# Altium PCB Sensor_current_V1.PcbDoc
Units mm, origin at the board's own origin, x right, y up, seen from the top; angles counter-clockwise.
Board outline 54.25 x 68 mm, 2 copper layers (Top Layer, Bottom Layer), stack 1.58 mm thick; 84 components, 14 nets, 214 pads, 33 vias.
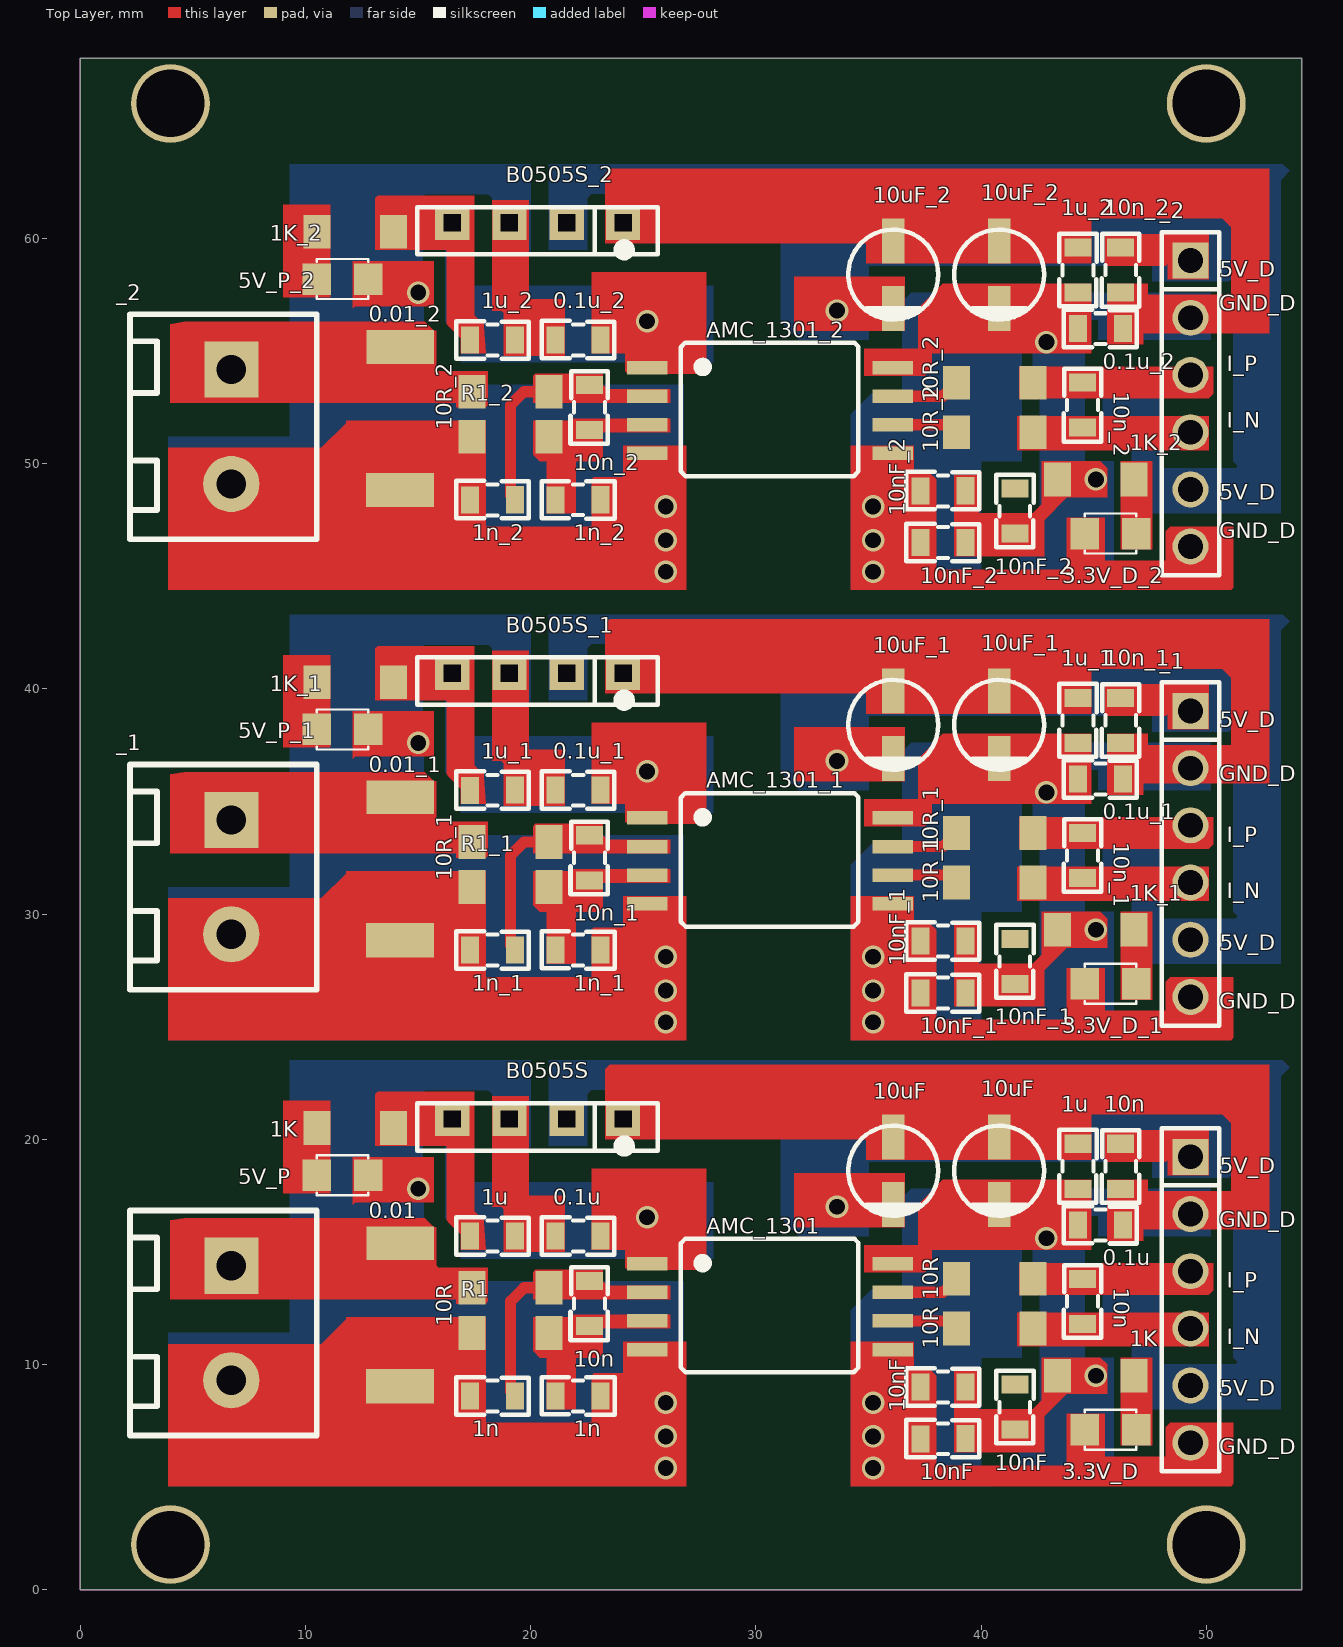
[diagram p0: Top Layer view]
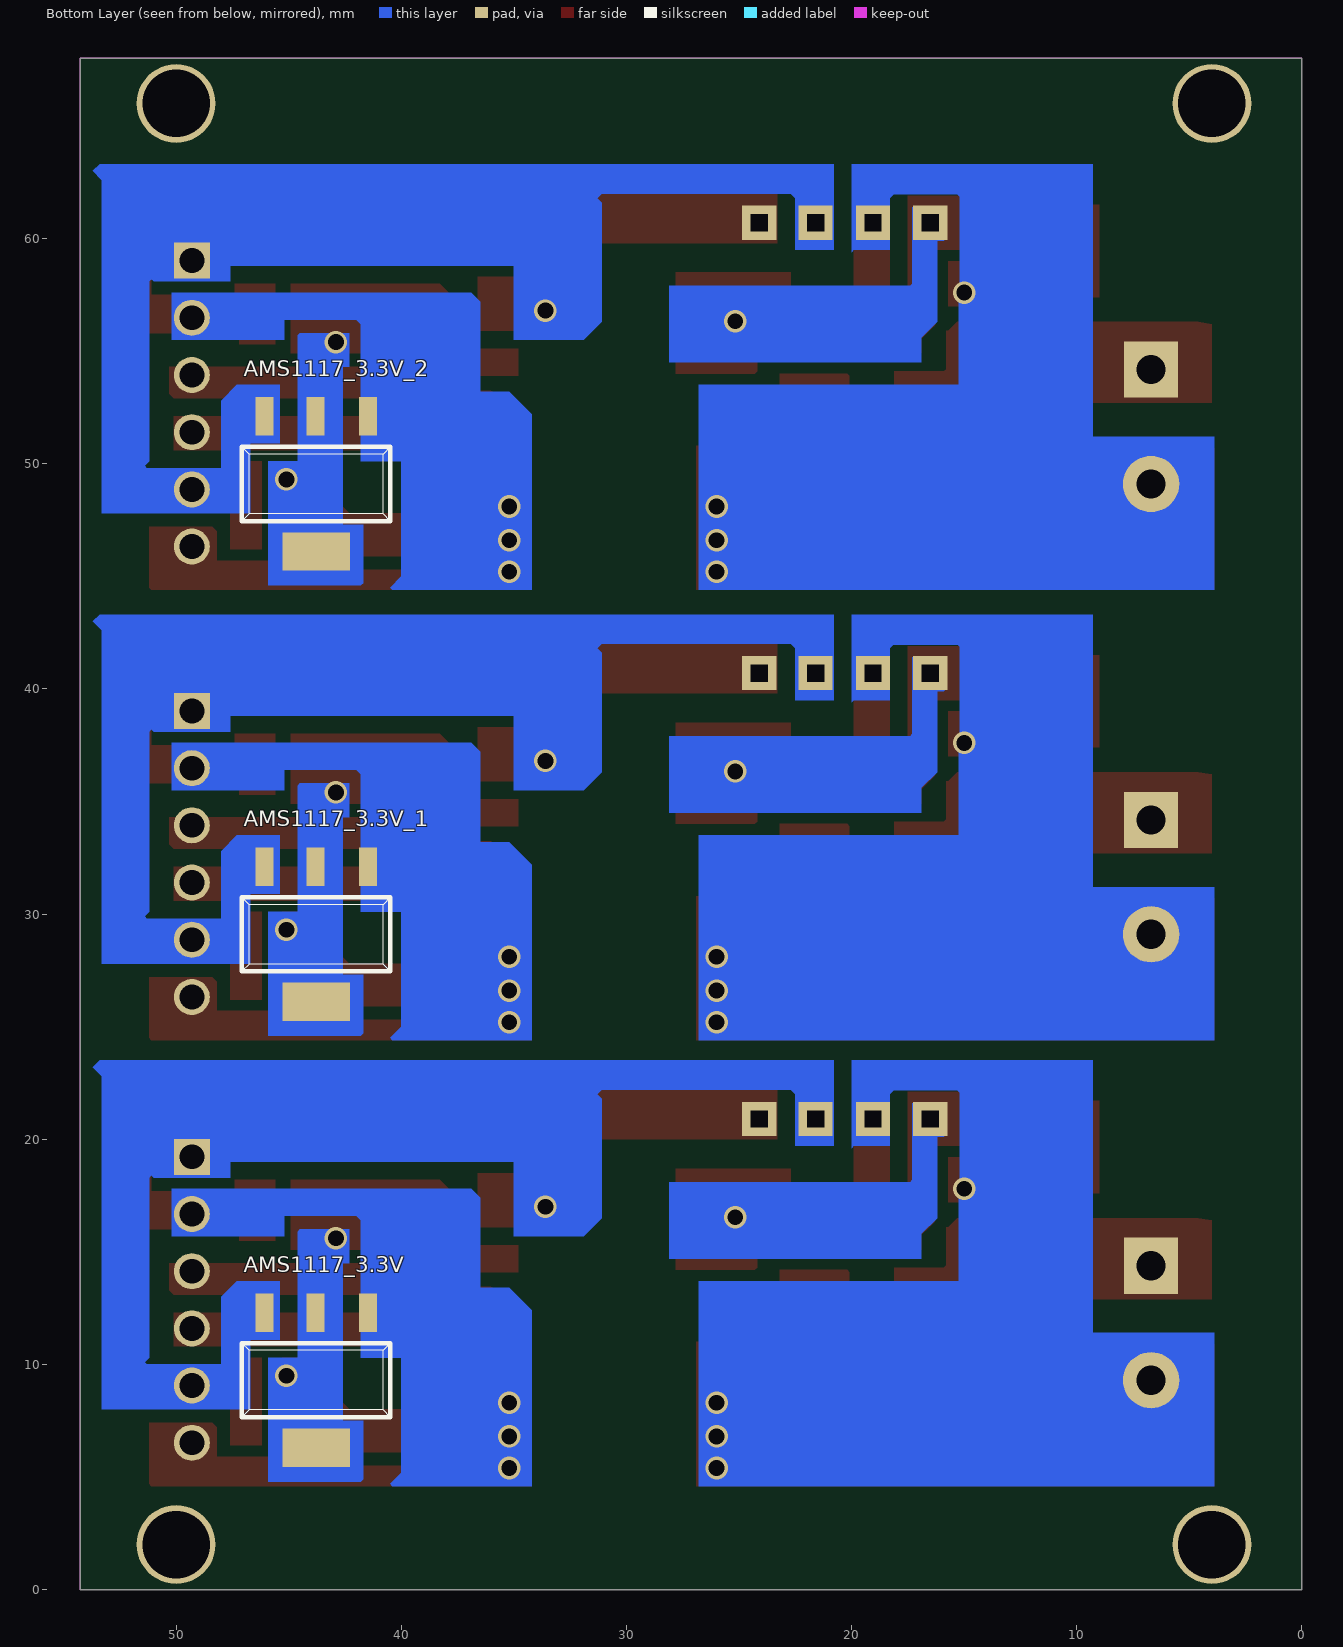
[diagram p1: Bottom Layer view, seen from below]
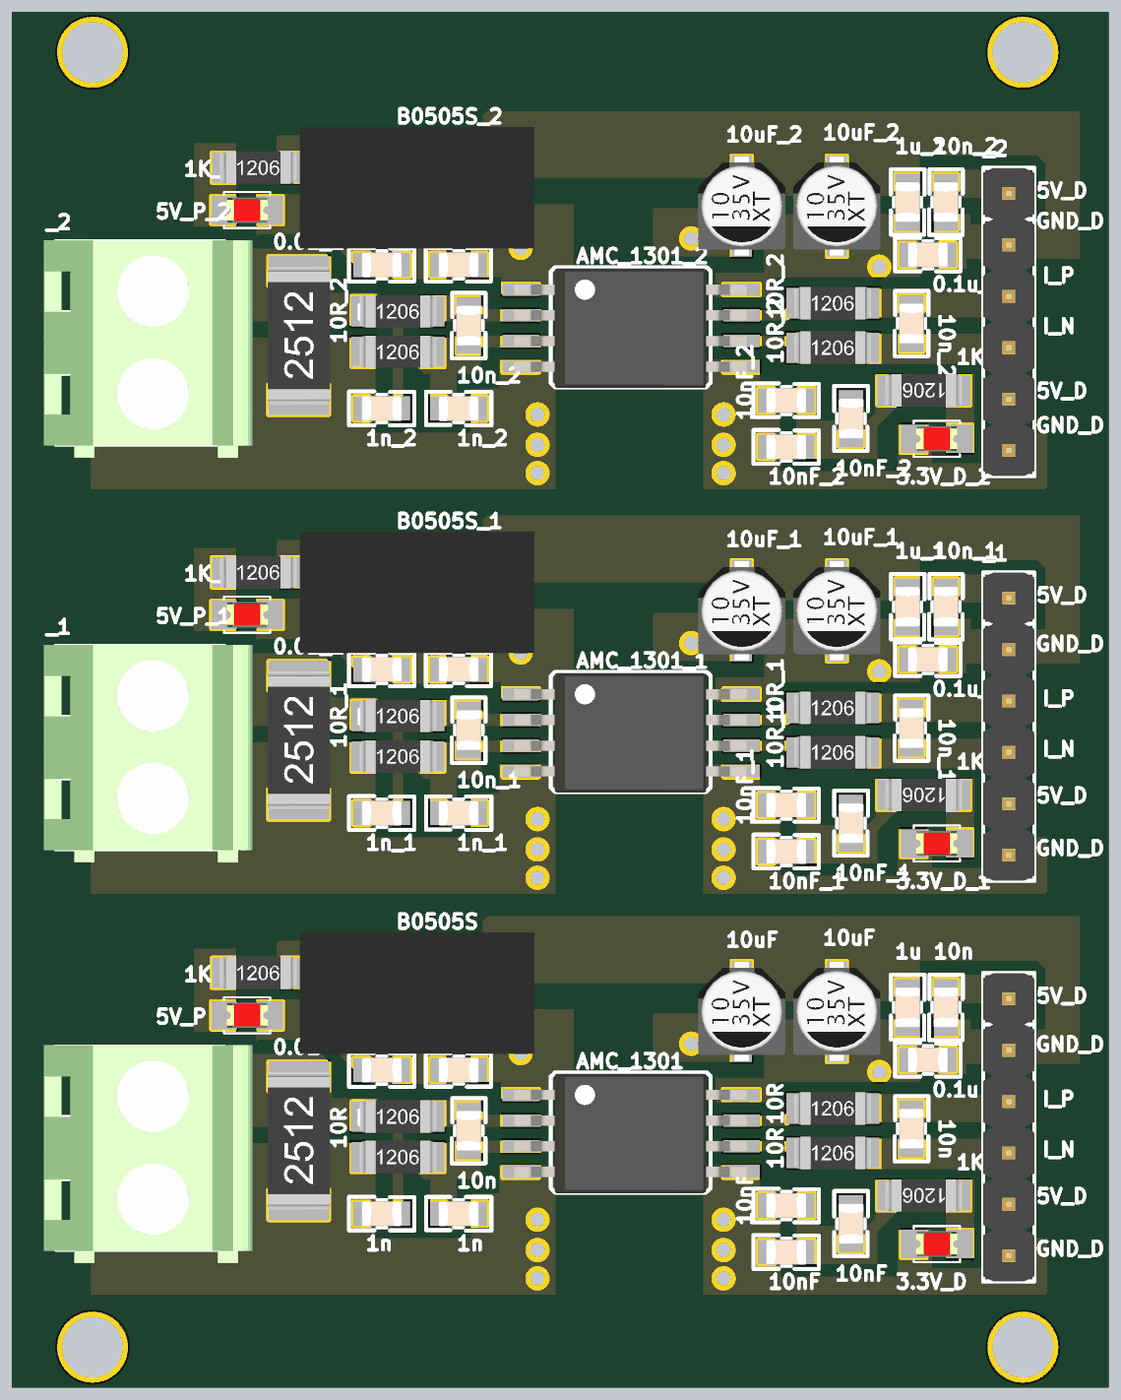
[diagram p2: 3D render of the assembled board from above, using the file's embedded part models]
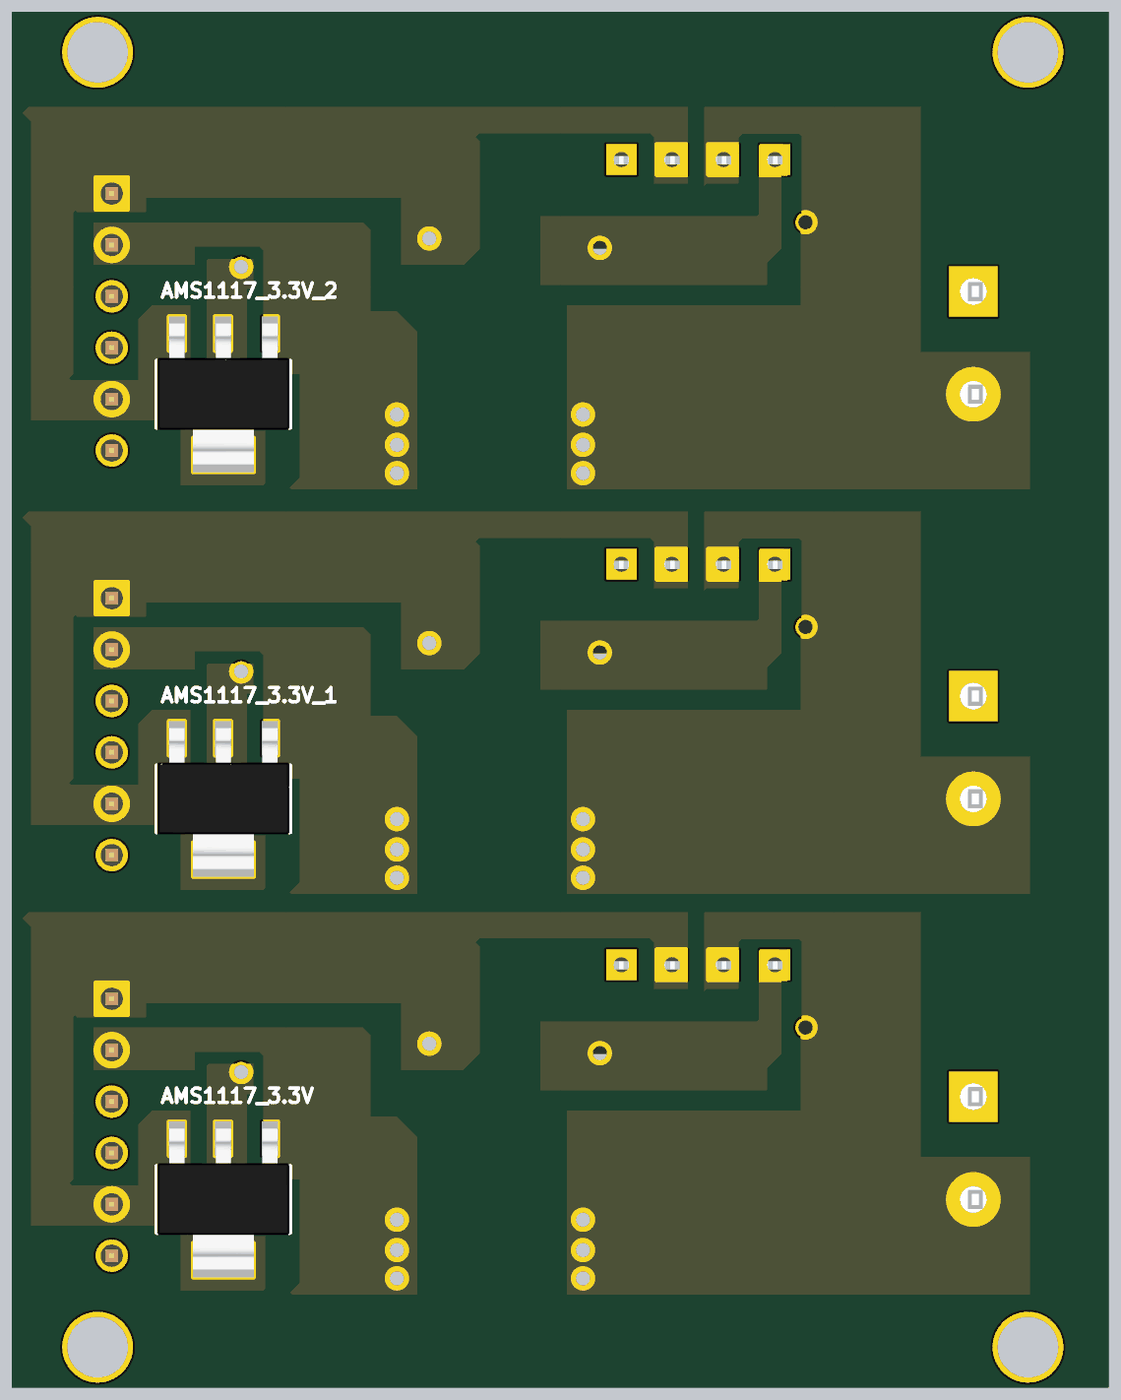
[diagram p3: 3D render of the assembled board from below, using the file's embedded part models]

## Layer stack, top to bottom
Top Solder: solder mask 0.01, Solder Resist, Dk 3.5
Top Layer: signal copper 0.035
Dielectric 1: dielectric 1.51, FR-4, Dk 4.8
Bottom Layer: signal copper 0.035
Bottom Solder: solder mask 0.01, Solder Resist, Dk 3.5

## Board outline
0,0 54.25,0 54.25,68 0,68

## Design rules (kind name [scope] priority, off if disabled: settings)
Clearance [All] p1: gap=0.5
PolygonConnect [All] p1: connectstyle=Relief reliefconductorwidth=0.254 reliefentries=4 polygonreliefangle="90 Angle" airgapwidth=0.254
RoutingVias [All] p1: holewidth=0.711 width=1.27 viastyle="Through Hole" minholewidth=0.711 minwidth=1.27 maxholewidth=0.711 maxwidth=1.27
SolderMaskExpansion [All] p1: expansion=0.102
Width [All] p1: maxlimit=2 minlimit=0.5 preferedwidth=0.5
30 further rules are at their usual default settings.

## Classes and differential pairs
component class Sensoe_current_V1: C7 L2 R1 R4 R7 Text

## Components (designator, comment, footprint, x,y, rotation, side; value= is the part's Value field where it differs from the comment)
0.01 "0R" RES_2512 14.4,12.2 r90 top (schematic designator R3)
0.01_1 "0R" RES_2512 14.4,32 r90 top (schematic designator R3)
0.01_2 "0R" RES_2512 14.4,52 r90 top (schematic designator R3)
0.1u "0.1uF" "Tu 0805_N" 22.1,15.703 r0 top (schematic designator C1)
0.1u "0.1uF" "Tu 0805_N" 45.3,16.2 r0 top (schematic designator C2)
0.1u_1 "0.1uF" "Tu 0805_N" 45.3,36 r0 top (schematic designator C2)
0.1u_1 "0.1uF" "Tu 0805_N" 22.1,35.503 r0 top (schematic designator C1)
0.1u_2 "0.1uF" "Tu 0805_N" 45.3,56 r0 top (schematic designator C2)
0.1u_2 "0.1uF" "Tu 0805_N" 22.1,55.503 r0 top (schematic designator C1)
1K "1K" RES1206 12.2,20.5 r0 top (schematic designator R6)
1K "1K" RES1206 45.1,9.5 r180 top (schematic designator R7)
1K_1 "1K" RES1206 45.1,29.3 r180 top (schematic designator R7)
1K_1 "1K" RES1206 12.2,40.3 r0 top (schematic designator R6)
1K_2 "1K" RES1206 45.1,49.3 r180 top (schematic designator R7)
1K_2 "1K" RES1206 12.2,60.3 r0 top (schematic designator R6)
1n "1nF" "Tu 0805_N" 22.1,8.597 r180 top (schematic designator C5)
1n "1nF" "Tu 0805_N" 18.3,8.6 r0 top (schematic designator C6)
1n_1 "1nF" "Tu 0805_N" 18.3,28.4 r0 top (schematic designator C6)
1n_1 "1nF" "Tu 0805_N" 22.1,28.397 r180 top (schematic designator C5)
1n_2 "1nF" "Tu 0805_N" 18.3,48.4 r0 top (schematic designator C6)
1n_2 "1nF" "Tu 0805_N" 22.1,48.397 r180 top (schematic designator C5)
1u "1uF" "Tu 0805_N" 18.3,15.7 r0 top (schematic designator C3)
1u "1uF" "Tu 0805_N" 44.303,18.8 r270 top (schematic designator C4)
1u_1 "1uF" "Tu 0805_N" 44.303,38.6 r270 top (schematic designator C4)
1u_1 "1uF" "Tu 0805_N" 18.3,35.5 r0 top (schematic designator C3)
1u_2 "1uF" "Tu 0805_N" 44.303,58.6 r270 top (schematic designator C4)
1u_2 "1uF" "Tu 0805_N" 18.3,55.5 r0 top (schematic designator C3)
3.3V_D "LED 0805" LED-0805-Red 46.886,7.1 r180 top (schematic designator L2)
3.3V_D_1 "LED 0805" LED-0805-Red 46.886,26.9 r180 top (schematic designator L2)
3.3V_D_2 "LED 0805" LED-0805-Red 46.886,46.9 r180 top (schematic designator L2)
5V_P "LED 0805" LED-0805-Red 10.5,18.4 r0 top (schematic designator L1)
5V_P_1 "LED 0805" LED-0805-Red 10.5,38.2 r0 top (schematic designator L1)
5V_P_2 "LED 0805" LED-0805-Red 10.5,58.2 r0 top (schematic designator L1)
10n "10nF" "Tu 0805_N" 44.497,12.8 r90 top (schematic designator C7)
10n "330nF" "Tu 0805_N" 22.6,12.7 r90 top (schematic designator C8)
10n "1uF" "Tu 0805_N" 46.197,18.8 r90 top (schematic designator C12)
10n_1 "1uF" "Tu 0805_N" 46.197,38.6 r90 top (schematic designator C12)
10n_1 "330nF" "Tu 0805_N" 22.6,32.5 r90 top (schematic designator C8)
10n_1 "10nF" "Tu 0805_N" 44.497,32.6 r90 top (schematic designator C7)
10n_2 "1uF" "Tu 0805_N" 46.197,58.6 r90 top (schematic designator C12)
10n_2 "330nF" "Tu 0805_N" 22.6,52.5 r90 top (schematic designator C8)
10n_2 "10nF" "Tu 0805_N" 44.497,52.6 r90 top (schematic designator C7)
10nF "1uF" "Tu 0805_N" 41.5,8.1 r270 top (schematic designator C11)
10nF "1uF" "Tu 0805_N" 38.3,6.7 r0 top (schematic designator C13)
10nF "1uF" "Tu 0805_N" 38.3,9 r0 top (schematic designator C14)
10nF_1 "1uF" "Tu 0805_N" 38.3,28.8 r0 top (schematic designator C14)
10nF_1 "1uF" "Tu 0805_N" 38.3,26.5 r0 top (schematic designator C13)
10nF_1 "1uF" "Tu 0805_N" 41.5,27.9 r270 top (schematic designator C11)
10nF_2 "1uF" "Tu 0805_N" 38.3,48.8 r0 top (schematic designator C14)
10nF_2 "1uF" "Tu 0805_N" 38.3,46.5 r0 top (schematic designator C13)
10nF_2 "1uF" "Tu 0805_N" 41.5,47.9 r270 top (schematic designator C11)
10R "10K" RES1206 40.6,13.8 r0 top (schematic designator R2)
10R "10K" RES1206 40.6,11.6 r0 top (schematic designator R4)
10R "10R" RES1206 19.1,13.4 r0 top (schematic designator R5)
10R_1 "10R" RES1206 19.1,33.2 r0 top (schematic designator R5)
10R_1 "10K" RES1206 40.6,31.4 r0 top (schematic designator R4)
10R_1 "10K" RES1206 40.6,33.6 r0 top (schematic designator R2)
10R_2 "10R" RES1206 19.1,53.2 r0 top (schematic designator R5)
10R_2 "10K" RES1206 40.6,51.4 r0 top (schematic designator R4)
10R_2 "10K" RES1206 40.6,53.6 r0 top (schematic designator R2)
10uF "10uF_35V" tu_4x5.4mm 40.8,18.6 r90 top (schematic designator C9)
10uF "10uF_35V" tu_4x5.4mm 36.1,18.6 r90 top (schematic designator C10)
10uF_1 "10uF_35V" tu_4x5.4mm 36.1,38.4 r90 top (schematic designator C10)
10uF_1 "10uF_35V" tu_4x5.4mm 40.8,38.4 r90 top (schematic designator C9)
10uF_2 "10uF_35V" tu_4x5.4mm 36.1,58.4 r90 top (schematic designator C10)
10uF_2 "10uF_35V" tu_4x5.4mm 40.8,58.4 r90 top (schematic designator C9)
_1 "JP 1x6 2.54" "JP 1X6 DT" 49.3,39.02 r270 top (schematic designator JP1)
_1 "domino" domino_2pin_5.08mm 6.7,31.64 r270 top (schematic designator J1)
_2 "JP 1x6 2.54" "JP 1X6 DT" 49.3,59.02 r270 top (schematic designator JP1)
_2 "domino" domino_2pin_5.08mm 6.7,51.64 r270 top (schematic designator J1)
AMC_1301 "AMC_1301" SOIC_8_SO8W 31,13.2 r0 top (schematic designator U1)
AMC_1301_1 "AMC_1301" SOIC_8_SO8W 31,33 r0 top (schematic designator U1)
AMC_1301_2 "AMC_1301" SOIC_8_SO8W 31,53 r0 top (schematic designator U1)
AMS1117_3.3V "AMS1117_3.3V" TO-252 43.78,9.3 r0 bottom (schematic designator U3)
AMS1117_3.3V_1 "AMS1117_3.3V" TO-252 43.78,29.1 r0 bottom (schematic designator U3)
AMS1117_3.3V_2 "AMS1117_3.3V" TO-252 43.78,49.1 r0 bottom (schematic designator U3)
B0505S "DC_DC_5V" B0512S/D-1W 20.25,20.6 r0 top (schematic designator U2)
B0505S_1 "DC_DC_5V" B0512S/D-1W 20.25,40.4 r0 top (schematic designator U2)
B0505S_2 "DC_DC_5V" B0512S/D-1W 20.25,60.4 r0 top (schematic designator U2)
J1 "domino" domino_2pin_5.08mm 6.7,11.84 r270 top
JP1 "JP 1x6 2.54" "JP 1X6 DT" 49.3,19.22 r270 top
R1 "10R" RES1206 19.1,11.4 r0 top
R1_1 "10R" RES1206 19.1,31.2 r0 top (schematic designator R1)
R1_2 "10R" RES1206 19.1,51.2 r0 top (schematic designator R1)

## Footprints (in the part's own frame and the unit in brackets; to place one, negate y for a bottom-side part, rotate by r counter-clockwise, add the part's x,y. Pads: shape width x height; smd on the part's side, far side on the other; paste and mask are expansions set on the pad)
B0512S/D-1W [mm] "B0512S/D-1W"
  rect 1.52x1.52 hole 0.75 square: 1(3.85,0.3) 2(1.35,0.3) 3(-1.2,0.3) 4(-3.74,0.3)
  silkscreen extent -5.28,-1.12 5.38,1, body extent -6,-4.1 5.6,1.91, height 18
domino_2pin_5.08mm [mm]
  rect 2.5x2.4 hole 1.3: 1(-2.54,0)
  round 2.5 hole 1.3: 2(2.54,0)
  silkscreen extent -5,-4.5 5,3.8, body extent -5.08,-5.1 5.68,5.2, height 13.59
"JP 1X6 DT" [mm] "6 pins, 1 row, straight, gold plating"
  rect 1.6x1.6 hole 1.1: 1(0,0)
  round 1.6 hole 1.1: 2(2.54,0) 3(5.08,0) 4(7.62,0) 5(10.16,0) 6(12.7,0)
  silkscreen extent -1.27,-1.27 13.97,1.27, body extent -1.27,-1.27 13.97,1.27, height 8.54
LED-0805-Red [mil]
  rect 50x55 smd: 1(0,0) 2(90,0)
  silkscreen extent 0,-35 90,35, body extent 5,-25 85,25, height 43
RES1206 [mm]
  rect 1.2x1.5 smd: 1(-1.7,0) 2(1.7,0)
  body extent -1.9,-0.8 1.9,0.8, height 0.6
RES_2512 [mm]
  rect 1.5x3 smd: 1(3.185,0.2)
  rect 1.524x3 smd: 2(-3.166,0.208)
  body extent -3.4,-1.35 3.4,1.75, height 0.6
SOIC_8_SO8W [mm] "AMC_1301"
  rect 1.8x0.6 smd: 1(-5.832,1.27) 2(-5.832,0) 3(-5.832,-1.27) 4(-5.832,-2.54) 5(5.08,-2.54) 6(5.08,-1.27) 7(5.08,0) 8(5.08,1.27)
  silkscreen extent -4.35,-3.55 3.55,2.37, body extent -6.15,-3.58 5.35,2.32, height 2.7
TO-252 [mm] "TO-252"
  rect 0.8x1.705 smd: 1(-2.3,-3) 2(0.02,-3) 3(2.3,-3)
  rect 3x1.705 smd: 2(0,3)
  silkscreen extent -3.3,-1.65 3.3,1.65, body extent -3.25,-3.5 3.25,3.46, height 1.7
"Tu 0805_N" [mm] "Compoment SMD 80x50mil"
  rect 0.8x1.2 smd: 1(-1,-0.003) 2(1,0)
  silkscreen extent -1.62,-0.83 1.61,0.83, body extent -1,-0.62 1,0.63, height 1.26
tu_4x5.4mm [mm]
  rect 2x1 smd: 1(-1.5,0) 2(1.5,0)
  silkscreen extent -2,-2 2,2, body extent -2.45,-2.15 2.45,2.15, height 5.4

## Part data
0.01 0.01_1 0.01_2 1K 1K 1K_1 1K_1 1K_2 1K_2 10R 10R 10R 10R_1 10R_1 10R_1 10R_2 10R_2 10R_2 R1 R1_1 R1_2: library part 311-0.0GRTR-ND
0.1u 0.1u 0.1u_1 0.1u_1 0.1u_2 0.1u_2 1n 1n 1n_1 1n_1 1n_2 1n_2 1u 1u 1u_1 1u_1 1u_2 1u_2 10n 10n 10n 10n_1 10n_1 10n_1 10n_2 10n_2 10n_2 10nF 10nF 10nF 10nF_1 10nF_1 10nF_1 10nF_2 10nF_2 10nF_2: library part cap_0805
3.3V_D 3.3V_D_1 3.3V_D_2 5V_P 5V_P_1 5V_P_2: library part "LED 0805 Do", "Dán"
10uF 10uF 10uF_1 10uF_1 10uF_2 10uF_2: library part capacitor_electric, "capacitor_electric"
_1 _2 JP1: library part "JP 1x6 2.54 Duc Thang", "C?m"
AMS1117_3.3V AMS1117_3.3V_1 AMS1117_3.3V_2: library part AMS1117CD, "AMS1117CD"
B0505S B0505S_1 B0505S_2: library part DC_DC_5v

## Free pads (board coordinates)
  round 3.5 hole 3: 2(4,2) 2(4,66) 2(50,2) 3(50,66)

## Via types
v1: diameter 1, hole 0.7, Top Layer to Bottom Layer, 33 vias

## Nets (pads, with @x,y where several pads share a name; then routed paths per layer and width w, separated by ;. In a path a pad name is that pad's centre, name@x,y a point inside that pad or via, vN(x,y) a via of type N, cw(c..) or ccw(c..) an arc to the next point about the centre after c; other vN are vias at no path point)
GND_D: 0.1u.2@46.3,16.2 1u.1@44.3,19.8 3.3V_D.2 10n.1@46.2,17.8 10nF.1@37.3,6.697 10nF.1@37.3,8.997 10uF.2 AMC_1301.5 AMS1117_3.3V.1 B0505S.1 JP1.2 JP1.6 | length 88.9
  Top Layer w0.5: B0505S.1 24.1,22.3 24.6,22.8 35.7,22.8 36.1,22.4 36.1,20.1 40.8,20.1 44,20.1 44.3,19.8 44.3,21.3 44.8,21.8 50.9,21.8 51.7,21 51.7,17.2 51.18,16.68 JP1.2 48.98,17 46.2,17 10n.1@46.2,17.8 ; v1(35.2,8.3) 35.897,8.997 36.103,8.997 ; AMC_1301.5 36.08,9.02 36.103,8.997 ; 44.3,4.9 44.3,5.1 ; 3.3V_D.2 44.3,6.8 44.3,5.1 ; JP1.6 47.88,5.1 44.3,5.1 ; 36.103,8.997 37.3,8.997 37.3,6.697 37.3,5.6 37.8,5.1 44.3,5.1
  Bottom Layer w0.5: v1@35.4,8.2 35.4,11.5 36.2,12.3 AMS1117_3.3V.1 41.48,16.48 42,17 48.98,17 JP1.2
  other v1: 35.2,5.4 35.2,6.8
GND_P: 0.01.2 0.1u.1@21.1,15.7 1n.1 1u.2@19.3,15.7 5V_P.2 AMC_1301.4 B0505S.3 J1.2 R1.1 | length 64.5
  Top Layer w0.5: J1.2 13.926,9.3 0.01.2 14.192,9.992 15.6,11.4 R1.1 17.4,8.697 17.3,8.597 17.3,7.4 17.9,6.8 22.7,6.8 23.1,7.2 23.1,8.6 24.6,8.6 25.168,9.168 AMC_1301.4 ; 5V_P.2 14.8,18.4 15,18.2 v1(15,17.8) ; B0505S.3 19.05,15.95 19.3,15.7 0.1u.1@21.1,15.7
  Bottom Layer w0.5: J1.2 14.4,9.3 15,9.9 v1(15,17.8) 14.3,18.5 14.3,21.5 15.21,22.41 18.69,22.41 19.05,22.05 B0505S.3
  other v1: 26,5.4 26,6.8 26,8.3
NetC1_2: 0.1u.2@23.1,15.703 1K.2@13.9,20.5 1u.1@17.3,15.697 AMC_1301.1 B0505S.4 | length 25.3
  Top Layer w0.5: 1K.2@13.9,20.5 14.3,20.9 B0505S.4 16.51,16.486 1u.1@17.3,15.697 ; 0.1u.2@23.1,15.703 24.897,15.703 25.168,15.432 ; AMC_1301.1 25.168,15.432 ; v1(25.168,16.532) 25.168,15.432
  Bottom Layer w0.5: B0505S.4 16.51,16.99 16.968,16.532 v1(25.168,16.532)
NetC2_1: 0.1u.1@44.3,16.197 1K.2@43.4,9.5 1u.2@44.303,17.8 10nF.2 10uF.1@40.8,17.1 AMC_1301.8 AMS1117_3.3V.2 | length 33.9
  Top Layer w0.5: AMC_1301.8 37.17,14.47 37.55,14.85 37.55,16.25 38.4,17.1 40.8,17.1 44.303,17.1 ; 10nF.2@39.3,9 39.3,6.7 39.7,7.1 41.5,7.1 41.8,7.1 43.5,8.8 43.5,9.5 v1(45.1,9.5) ; v1@43.3,15.7 43.797,16.197 44.3,16.197 44.303,16.2 44.303,17.1 ; 1u.2@44.303,17.8 44.303,17.1
  Bottom Layer w0.5: v1(42.9,15.6) 43.5,15.6 43.8,15.3 43.8,12.3 43.8,9.5 ; AMS1117_3.3V.2@43.78,6.3 43.8,6.32 43.8,9.5 ; v1(45.1,9.5) 43.8,9.5
NetC5_2: 1n.2@21.1,8.597 10n.1@22.603,11.7 AMC_1301.3 R1.2 | length 7.5
  Top Layer w0.5: 1n.2@21.1,8.597 21.1,11.1 R1.2 21.1,11.7 22.603,11.7 22.833,11.93 AMC_1301.3
NetC6_2: 1n.2@19.3,8.6 10n.2@22.6,13.7 10R.2@20.8,13.4 AMC_1301.2 | length 11
  Top Layer w0.5: 1n.2@19.3,8.6 19.1,8.8 19.1,12.8 19.7,13.4 20.8,13.4 10n.2@22.7,13.4 ; 10n.2@22.6,13.7 22.6,13.5 10n.2@22.7,13.4 ; AMC_1301.2 22.9,13.2 10n.2@22.7,13.4
NetC7_1: 10n.1@44.5,11.8 10R.2@42.3,11.6 JP1.4 | length 7.2
  Top Layer w0.5: 10R.2@42.3,11.6 44.3,11.6 44.5,11.8 49.1,11.8 JP1.4
NetC7_2: 10n.2@44.497,13.8 10R.2@42.3,13.8 JP1.3 | length 7.1
  Top Layer w0.5: 10R.2@42.3,13.8 44.496,13.8 48.96,13.8 JP1.3
NetC10_1: 10n.2@46.197,19.8 10uF.1@36.1,17.1 AMS1117_3.3V.3 B0505S.2 JP1.1 JP1.5 | length 65.5
  Top Layer w0.5: v1(33.6,17) 33.7,17.1 10uF.1@36.1,17.1 ; 10n.2@46.197,19.8 48.72,19.8 JP1.1
  Bottom Layer w0.5: B0505S.2 21.6,22.4 22,22.8 33.4,22.8 ; v1(33.6,17) 33.4,17.2 33.4,22.8 ; AMS1117_3.3V.3 46.7,12.3 47.04,11.96 47.04,10.06 47.6,9.5 48.86,9.5 JP1.5 49.74,9.5 52.1,9.5 52.3,9.7 52.3,18.6 51.68,19.22 JP1.1 49.3,22.2 48.7,22.8 33.4,22.8
NetJ1_1: 0.01.1 10R.1@17.4,13.4 J1.1 | length 11.9
  Top Layer w0.5: J1.1 13.195,14.38 0.01.1 16.185,13.4 10R.1@17.4,13.4
NetL1_1: 1K.1@10.5,20.5 5V_P.1 | length 2.1
  Top Layer w0.5: 5V_P.1 1K.1@10.5,20.5
NetL2_1: 1K.1@46.8,9.5 3.3V_D.1 | length 2.4
  Top Layer w0.5: 3.3V_D.1 46.9,7.114 1K.1@46.9,9.5
NetR2_1: 10R.1@38.9,13.8 AMC_1301.7 | length 3.1
  Top Layer w0.5: AMC_1301.7 38.3,13.2 10R.1@38.9,13.8
NetR4_1: 10R.1@38.9,11.6 AMC_1301.6 | length 3
  Top Layer w0.5: AMC_1301.6 38.57,11.93 10R.1@38.9,11.6
pads on no net: 0.01_1.1 0.01_1.2 0.01_2.1 0.01_2.2 0.1u_1.1 0.1u_1.2 0.1u_2.1 0.1u_2.2 1K_1.1 1K_1.2 1K_2.1 1K_2.2 1n_1.1 1n_1.2 1n_2.1 1n_2.2 1u_1.1 1u_1.2 1u_2.1 1u_2.2 3.3V_D_1.1 3.3V_D_1.2 3.3V_D_2.1 3.3V_D_2.2 5V_P_1.1 5V_P_1.2 5V_P_2.1 5V_P_2.2 10n_1.1 10n_1.2 10n_2.1 10n_2.2 10nF.1@41.497,9.1 10nF_1.1 10nF_1.2 10nF_2.1 10nF_2.2 10R_1.1 10R_1.2 10R_2.1 10R_2.2 10uF_1.1 10uF_1.2 10uF_2.1 10uF_2.2 _1.1 _1.2 _1.3 _1.4 _1.5 _1.6 _2.1 _2.2 _2.3 _2.4 _2.5 _2.6 AMC_1301_1.1 AMC_1301_1.2 AMC_1301_1.3 AMC_1301_1.4 AMC_1301_1.5 AMC_1301_1.6 AMC_1301_1.7 AMC_1301_1.8 AMC_1301_2.1 AMC_1301_2.2 AMC_1301_2.3 AMC_1301_2.4 AMC_1301_2.5 AMC_1301_2.6 AMC_1301_2.7 AMC_1301_2.8 AMS1117_3.3V_1.1 AMS1117_3.3V_1.2 AMS1117_3.3V_1.3 AMS1117_3.3V_2.1 AMS1117_3.3V_2.2 AMS1117_3.3V_2.3 B0505S_1.1 B0505S_1.2 B0505S_1.3 B0505S_1.4 B0505S_2.1 B0505S_2.2 B0505S_2.3 B0505S_2.4 R1_1.1 R1_1.2 R1_2.1 R1_2.2
copper on no net: | length 666.8
  Top Layer w0.5: 6.7,29.1 13.926,29.1 14.192,28.834 14.192,29.792 15.6,31.2 17.4,31.2 17.4,28.497 17.3,28.397 17.3,27.2 17.9,26.6 22.7,26.6 23.1,27 23.1,28.4 24.6,28.4 25.168,28.968 25.168,30.46 ; 6.7,34.18 13.195,34.18 14.2,35.185 16.185,33.2 17.4,33.2 ; 6.7,49.1 13.926,49.1 14.192,48.834 14.192,49.792 15.6,51.2 17.4,51.2 17.4,48.497 17.3,48.397 17.3,47.2 17.9,46.6 22.7,46.6 23.1,47 23.1,48.4 24.6,48.4 25.168,48.968 25.168,50.46 ; 6.7,54.18 13.195,54.18 14.2,55.185 16.185,53.2 17.4,53.2 ; 10.5,38.2 10.5,40.3 ; 10.5,58.2 10.5,60.3 ; 12.786,38.2 14.8,38.2 15,38 v1(15,37.6) ; 12.786,58.2 14.8,58.2 15,58 v1(15,57.6) ; 13.9,40.3 14.3,40.7 16.51,40.7 16.51,36.286 17.3,35.497 ; 13.9,60.3 14.3,60.7 16.51,60.7 16.51,56.286 17.3,55.497 ; 19.05,40.7 19.05,35.75 19.3,35.5 21.1,35.5 ; 19.05,60.7 19.05,55.75 19.3,55.5 21.1,55.5 ; 19.3,28.4 19.1,28.6 19.1,32.6 19.7,33.2 20.8,33.2 22.7,33.2 ; 19.3,48.4 19.1,48.6 19.1,52.6 19.7,53.2 20.8,53.2 22.7,53.2 ; 21.1,28.397 21.1,30.9 20.8,31.2 21.1,31.5 22.603,31.5 22.833,31.73 25.168,31.73 ; 21.1,48.397 21.1,50.9 20.8,51.2 21.1,51.5 22.603,51.5 22.833,51.73 25.168,51.73 ; 22.6,33.5 22.6,33.3 22.7,33.2 ; 22.6,53.5 22.6,53.3 22.7,53.2 ; 23.1,35.503 24.897,35.503 25.168,35.232 ; 23.1,55.503 24.897,55.503 25.168,55.232 ; 24.1,40.7 24.1,42.1 24.6,42.6 35.7,42.6 36.1,42.2 36.1,39.9 40.8,39.9 44,39.9 44.3,39.6 44.3,41.1 44.8,41.6 50.9,41.6 51.7,40.8 51.7,37 51.18,36.48 49.3,36.48 48.98,36.8 46.2,36.8 46.2,37.6 ; 24.1,60.7 24.1,62.1 24.6,62.6 35.7,62.6 36.1,62.2 36.1,59.9 40.8,59.9 44,59.9 44.3,59.6 44.3,61.1 44.8,61.6 50.9,61.6 51.7,60.8 51.7,57 51.18,56.48 49.3,56.48 48.98,56.8 46.2,56.8 46.2,57.6 ; 25.168,33 22.9,33 22.7,33.2 ; 25.168,34.27 25.168,35.232 ; v1(25.168,36.332) 25.168,35.232 ; 25.168,53 22.9,53 22.7,53.2 ; 25.168,54.27 25.168,55.232 ; v1(25.168,56.332) 25.168,55.232 ; v1(33.6,36.8) 33.7,36.9 36.1,36.9 ; v1(33.6,56.8) 33.7,56.9 36.1,56.9 ; v1(35.2,28.1) 35.897,28.797 36.103,28.797 ; v1(35.2,48.1) 35.897,48.797 36.103,48.797 ; 36.08,30.46 36.08,28.82 36.103,28.797 ; 36.08,31.73 38.57,31.73 38.9,31.4 ; 36.08,33 38.3,33 38.9,33.6 ; 36.08,34.27 37.17,34.27 37.55,34.65 37.55,36.05 38.4,36.9 40.8,36.9 44.303,36.9 ; 36.08,50.46 36.08,48.82 36.103,48.797 ; 36.08,51.73 38.57,51.73 38.9,51.4 ; 36.08,53 38.3,53 38.9,53.6 ; 36.08,54.27 37.17,54.27 37.55,54.65 37.55,56.05 38.4,56.9 40.8,56.9 44.303,56.9 ; 39.3,28.8 39.3,26.5 39.7,26.9 41.5,26.9 41.8,26.9 43.5,28.6 43.5,29.3 v1(45.1,29.3) ; 39.3,48.8 39.3,46.5 39.7,46.9 41.5,46.9 41.8,46.9 43.5,48.6 43.5,49.3 v1(45.1,49.3) ; 42.3,31.4 44.3,31.4 44.5,31.6 49.1,31.6 49.3,31.4 ; 42.3,33.6 44.496,33.6 48.96,33.6 49.3,33.94 ; 42.3,51.4 44.3,51.4 44.5,51.6 49.1,51.6 49.3,51.4 ; 42.3,53.6 44.496,53.6 48.96,53.6 49.3,53.94 ; v1@43.3,35.5 43.797,35.997 44.3,35.997 44.303,36 44.303,36.9 ; v1@43.3,55.5 43.797,55.997 44.3,55.997 44.303,56 44.303,56.9 ; 44.3,24.7 44.3,24.9 ; 44.3,44.7 44.3,44.9 ; 44.303,37.6 44.303,36.9 ; 44.303,57.6 44.303,56.9 ; 44.6,26.9 44.3,26.6 44.3,24.9 ; 44.6,46.9 44.3,46.6 44.3,44.9 ; 46.197,39.6 48.72,39.6 49.3,39.02 ; 46.197,59.6 48.72,59.6 49.3,59.02 ; 46.886,26.9 46.9,26.914 46.9,29.3 ; 46.886,46.9 46.9,46.914 46.9,49.3 ; 49.3,26.32 47.88,24.9 44.3,24.9 ; 49.3,46.32 47.88,44.9 44.3,44.9 ; 36.103,28.797 37.3,28.797 37.3,26.497 37.3,25.4 37.8,24.9 44.3,24.9 ; 36.103,48.797 37.3,48.797 37.3,46.497 37.3,45.4 37.8,44.9 44.3,44.9
  Bottom Layer w0.5: 6.7,29.1 14.4,29.1 15,29.7 v1(15,37.6) 14.3,38.3 14.3,41.3 15.21,42.21 18.69,42.21 19.05,41.85 19.05,40.7 ; 6.7,49.1 14.4,49.1 15,49.7 v1(15,57.6) 14.3,58.3 14.3,61.3 15.21,62.21 18.69,62.21 19.05,61.85 19.05,60.7 ; 16.51,40.7 16.51,36.79 16.968,36.332 v1(25.168,36.332) ; 16.51,60.7 16.51,56.79 16.968,56.332 v1(25.168,56.332) ; 21.6,40.7 21.6,42.2 22,42.6 33.4,42.6 ; 21.6,60.7 21.6,62.2 22,62.6 33.4,62.6 ; v1(33.6,36.8) 33.4,37 33.4,42.6 ; v1(33.6,56.8) 33.4,57 33.4,62.6 ; v1@35.4,28 35.4,31.3 36.2,32.1 41.48,32.1 41.48,36.28 42,36.8 48.98,36.8 49.3,36.48 ; v1@35.4,48 35.4,51.3 36.2,52.1 41.48,52.1 41.48,56.28 42,56.8 48.98,56.8 49.3,56.48 ; v1(42.9,35.4) 43.5,35.4 43.8,35.1 43.8,32.1 43.8,29.3 ; v1(42.9,55.4) 43.5,55.4 43.8,55.1 43.8,52.1 43.8,49.3 ; 43.78,26.1 43.8,26.12 43.8,29.3 ; 43.78,46.1 43.8,46.12 43.8,49.3 ; v1(45.1,29.3) 43.8,29.3 ; v1(45.1,49.3) 43.8,49.3 ; 46.08,32.1 46.7,32.1 47.04,31.76 47.04,29.86 47.6,29.3 48.86,29.3 49.3,28.86 49.74,29.3 52.1,29.3 52.3,29.5 52.3,38.4 51.68,39.02 49.3,39.02 49.3,42 48.7,42.6 33.4,42.6 ; 46.08,52.1 46.7,52.1 47.04,51.76 47.04,49.86 47.6,49.3 48.86,49.3 49.3,48.86 49.74,49.3 52.1,49.3 52.3,49.5 52.3,58.4 51.68,59.02 49.3,59.02 49.3,62 48.7,62.6 33.4,62.6
  other v1: 26,25.2 35.2,25.2 26,26.6 35.2,26.6 26,28.1 26,45.2 35.2,45.2 26,46.6 35.2,46.6 26,48.1

## Keep-outs
Keep-Out Layer:
  the board outline again, w0.05

## Other copper
Top Layer:
  region net GND_P: 3.9,10.9 3.9,6.1 3.9,4.6 16.3,4.6 26.9,4.6 26.9,5.3 26.9,6.9 26.9,11 24.1,11 24.1,9.6 22.8,9.6 22.7,9.5 22.7,7.4 18,7.4 18,7.8 18,8.2 18,12.1 11.8,12.1 11.8,12 10.7,10.9
  region net NetJ1_1: 4,16.4 4,12.9 16.7,12.9 16.7,12.7 18,12.7 18.1,12.8 18.1,14.3 15.9,14.3 15.8,14.4 15.8,16.1 15.7,16.1 15.3,16.5 4.6,16.5
  region net NetL1_1: 11.1,17.6 9,17.6 9,21.7 11.1,21.7
  region net NetC1_2: 18,15.1 16.9,15.1 16.9,15.8 16.3,16.4 16.3,19.7 13.1,19.7 13.1,22 13.2,22.1 17.5,22.1 17.5,16.8 17.7,16.6 17.9,16.6
  region net GND_P: 12.1,19.2 12.1,17.1 12.2,17.2 15.7,17.2 15.7,19.2
  region net NetC6_2: 26.2,12.9 20.1,12.9 20.1,14.1 20.2,14.2 23.2,14.2 23.2,13.7 23.4,13.5 26.2,13.5
  region net NetC5_2: 26.2,12.2 21.7,12.2 21.7,12.1 21.5,12.1 20.1,12.1 20.1,10.6 20.4,10.3 23,10.3 23.2,10.5 23.2,11.5 23.2,11.6 26.2,11.6
  region net NetC5_2: 20.7,8.1 20.7,10.9 21.9,10.9 22.2,10.6 22,10.4 22,8 20.7,8
  region net NetC1_2: 24.3,14.2 24.2,14.3 24.2,15.1 22.7,15.1 22.7,18.7 26.5,18.7 27.8,18.7 27.8,17.4 27.8,14.2
  region net GND_P: 18.3,21.9 18.3,17 18.7,17 18.8,16.9 18.8,15 21.5,15 21.5,17.4 21.4,17.5 19.9,17.5 19.9,21.9
  region net GND_D: 37,11 34.2,11 34.2,4.6 51.1,4.6 51.2,4.7 51.2,7.4 48.4,7.4 48.2,7.2 48.2,5.9 48.1,5.9 47.5,5.9 45.5,5.9 45.5,7.8 43.8,7.8 43.8,5.5 38,5.5 38,9.5 37.7,9.8 37,9.8
  region net NetC2_1: 39.9,9.7 38.8,9.7 38.8,6.1 42,6.1 42.8,6.1 42.8,6.9 42.8,7.7 43.8,8.7 45.6,8.7 45.6,10 45.3,10.3 42.7,10.3 42.7,8.4 42.3,8 39.9,8
  region net NetC2_1: 44.9,15.1 44.9,15.5 44.9,18.2 38.3,18.2 37.2,17.1 37.2,15.3 34.8,15.3 34.8,14.1 37.5,14.1 37.8,14.4 37.8,15.1 38.4,15.1 38.7,15.1
  region net GND_D: 45.6,18.2 45.6,15.9 45.6,15.5 46,15.5 46.9,15.5 47.2,15.5 47.2,16 52.8,16 52.8,22.3 52.8,23.3 51.8,23.3 23.5,23.3 23.3,23.1 23.3,20 26.8,20 34.9,20 34.9,19.1 44.9,19.1 44.9,19.3 44.9,21.1 50.7,21.1 51.1,20.7 51.1,17.7 47.4,17.7 47.4,18.2 47,18.2
  region net NetL2_1: 46.2,6.4 47.6,6.4 47.6,6.5 47.6,10.3 46.2,10.3
  region net NetC10_1: 36.6,16.1 31.8,16.1 31.7,16.2 31.7,18.5 36.6,18.5
  region net NetC10_1: 50.1,18.4 48.3,18.4 48.3,19.1 48.2,19 45.5,19 45.5,20.4 50.1,20.4
  region net NetC7_2: 41.7,14.5 41.7,13.1 50.1,13.1 50.3,13.3 50.3,14.5
  region net NetC7_1: 50.1,12.3 41.6,12.3 41.6,10.8 50.1,10.8 50.1,11.3
  region: 50.1,32.1 41.6,32.1 41.6,30.6 50.1,30.6 50.1,31.1
  region: 41.7,34.3 41.7,32.9 50.1,32.9 50.3,33.1 50.3,34.3
  region: 50.1,38.2 48.3,38.2 48.3,38.9 48.2,38.8 45.5,38.8 45.5,40.2 50.1,40.2
  region: 36.6,35.9 31.8,35.9 31.7,36 31.7,38.3 36.6,38.3
  region: 46.2,26.2 47.6,26.2 47.6,26.3 47.6,30.1 46.2,30.1
  region: 45.6,38 45.6,35.7 45.6,35.3 46,35.3 46.9,35.3 47.2,35.3 47.2,35.8 52.8,35.8 52.8,42.1 52.8,43.1 51.8,43.1 23.5,43.1 23.3,42.9 23.3,39.8 26.8,39.8 34.9,39.8 34.9,38.9 44.9,38.9 44.9,39.1 44.9,40.9 50.7,40.9 51.1,40.5 51.1,37.5 47.4,37.5 47.4,38 47,38
  region: 44.9,34.9 44.9,35.3 44.9,38 38.3,38 37.2,36.9 37.2,35.1 34.8,35.1 34.8,33.9 37.5,33.9 37.8,34.2 37.8,34.9 38.4,34.9 38.7,34.9
  region: 39.9,29.5 38.8,29.5 38.8,25.9 42,25.9 42.8,25.9 42.8,26.7 42.8,27.5 43.8,28.5 45.6,28.5 45.6,29.8 45.3,30.1 42.7,30.1 42.7,28.2 42.3,27.8 39.9,27.8
  region: 37,30.8 34.2,30.8 34.2,24.4 51.1,24.4 51.2,24.5 51.2,27.2 48.4,27.2 48.2,27 48.2,25.7 48.1,25.7 47.5,25.7 45.5,25.7 45.5,27.6 43.8,27.6 43.8,25.3 38,25.3 38,29.3 37.7,29.6 37,29.6
  region: 18.3,41.7 18.3,36.8 18.7,36.8 18.8,36.7 18.8,34.8 21.5,34.8 21.5,37.2 21.4,37.3 19.9,37.3 19.9,41.7
  region: 24.3,34 24.2,34.1 24.2,34.9 22.7,34.9 22.7,38.5 26.5,38.5 27.8,38.5 27.8,37.2 27.8,34
  region: 20.7,27.9 20.7,30.7 21.9,30.7 22.2,30.4 22,30.2 22,27.8 20.7,27.8
  region: 26.2,32 21.7,32 21.7,31.9 21.5,31.9 20.1,31.9 20.1,30.4 20.4,30.1 23,30.1 23.2,30.3 23.2,31.3 23.2,31.4 26.2,31.4
  region: 26.2,32.7 20.1,32.7 20.1,33.9 20.2,34 23.2,34 23.2,33.5 23.4,33.3 26.2,33.3
  region: 12.1,39 12.1,36.9 12.2,37 15.7,37 15.7,39
  region: 18,34.9 16.9,34.9 16.9,35.6 16.3,36.2 16.3,39.5 13.1,39.5 13.1,41.8 13.2,41.9 17.5,41.9 17.5,36.6 17.7,36.4 17.9,36.4
  region: 11.1,37.4 9,37.4 9,41.5 11.1,41.5
  region: 4,36.2 4,32.7 16.7,32.7 16.7,32.5 18,32.5 18.1,32.6 18.1,34.1 15.9,34.1 15.8,34.2 15.8,35.9 15.7,35.9 15.3,36.3 4.6,36.3
  region: 3.9,30.7 3.9,25.9 3.9,24.4 16.3,24.4 26.9,24.4 26.9,25.1 26.9,26.7 26.9,30.8 24.1,30.8 24.1,29.4 22.8,29.4 22.7,29.3 22.7,27.2 18,27.2 18,27.6 18,28 18,31.9 11.8,31.9 11.8,31.8 10.7,30.7
  region: 50.1,52.1 41.6,52.1 41.6,50.6 50.1,50.6 50.1,51.1
  region: 41.7,54.3 41.7,52.9 50.1,52.9 50.3,53.1 50.3,54.3
  region: 50.1,58.2 48.3,58.2 48.3,58.9 48.2,58.8 45.5,58.8 45.5,60.2 50.1,60.2
  region: 36.6,55.9 31.8,55.9 31.7,56 31.7,58.3 36.6,58.3
  region: 46.2,46.2 47.6,46.2 47.6,46.3 47.6,50.1 46.2,50.1
  region: 45.6,58 45.6,55.7 45.6,55.3 46,55.3 46.9,55.3 47.2,55.3 47.2,55.8 52.8,55.8 52.8,62.1 52.8,63.1 51.8,63.1 23.5,63.1 23.3,62.9 23.3,59.8 26.8,59.8 34.9,59.8 34.9,58.9 44.9,58.9 44.9,59.1 44.9,60.9 50.7,60.9 51.1,60.5 51.1,57.5 47.4,57.5 47.4,58 47,58
  region: 44.9,54.9 44.9,55.3 44.9,58 38.3,58 37.2,56.9 37.2,55.1 34.8,55.1 34.8,53.9 37.5,53.9 37.8,54.2 37.8,54.9 38.4,54.9 38.7,54.9
  region: 39.9,49.5 38.8,49.5 38.8,45.9 42,45.9 42.8,45.9 42.8,46.7 42.8,47.5 43.8,48.5 45.6,48.5 45.6,49.8 45.3,50.1 42.7,50.1 42.7,48.2 42.3,47.8 39.9,47.8
  region: 37,50.8 34.2,50.8 34.2,44.4 51.1,44.4 51.2,44.5 51.2,47.2 48.4,47.2 48.2,47 48.2,45.7 48.1,45.7 47.5,45.7 45.5,45.7 45.5,47.6 43.8,47.6 43.8,45.3 38,45.3 38,49.3 37.7,49.6 37,49.6
  region: 18.3,61.7 18.3,56.8 18.7,56.8 18.8,56.7 18.8,54.8 21.5,54.8 21.5,57.2 21.4,57.3 19.9,57.3 19.9,61.7
  region: 24.3,54 24.2,54.1 24.2,54.9 22.7,54.9 22.7,58.5 26.5,58.5 27.8,58.5 27.8,57.2 27.8,54
  region: 20.7,47.9 20.7,50.7 21.9,50.7 22.2,50.4 22,50.2 22,47.8 20.7,47.8
  region: 26.2,52 21.7,52 21.7,51.9 21.5,51.9 20.1,51.9 20.1,50.4 20.4,50.1 23,50.1 23.2,50.3 23.2,51.3 23.2,51.4 26.2,51.4
  region: 26.2,52.7 20.1,52.7 20.1,53.9 20.2,54 23.2,54 23.2,53.5 23.4,53.3 26.2,53.3
  region: 12.1,59 12.1,56.9 12.2,57 15.7,57 15.7,59
  region: 18,54.9 16.9,54.9 16.9,55.6 16.3,56.2 16.3,59.5 13.1,59.5 13.1,61.8 13.2,61.9 17.5,61.9 17.5,56.6 17.7,56.4 17.9,56.4
  region: 11.1,57.4 9,57.4 9,61.5 11.1,61.5
  region: 4,56.2 4,52.7 16.7,52.7 16.7,52.5 18,52.5 18.1,52.6 18.1,54.1 15.9,54.1 15.8,54.2 15.8,55.9 15.7,55.9 15.3,56.3 4.6,56.3
  region: 3.9,50.7 3.9,45.9 3.9,44.4 16.3,44.4 26.9,44.4 26.9,45.1 26.9,46.7 26.9,50.8 24.1,50.8 24.1,49.4 22.8,49.4 22.7,49.3 22.7,47.2 18,47.2 18,47.6 18,48 18,51.9 11.8,51.9 11.8,51.8 10.7,50.7
Bottom Layer:
  region net NetC1_2: 17.3,21.6 15.8,21.6 15.8,20.2 15.9,20.1 16.2,20.1 16.2,16.5 16.9,15.8 16.9,14.7 28.1,14.7 28.1,18.1 17.4,18.1 17.3,18.2
  region net GND_P: 3.9,11.4 3.9,4.6 15,4.6 26.8,4.6 26.8,5.4 26.8,13.7 15.2,13.7 15.2,22.2 18.1,22.2 18.3,22 18.3,19.7 19.9,19.7 20,19.6 20,23.5 12.2,23.5 9.3,23.5 9.3,11.4
  region net NetC2_1: 42.3,16 42.3,14.5 42.6,14.5 42.6,7.5 41.7,7.5 41.7,4.9 41.8,4.8 45.9,4.8 45.9,7.7 45.9,9.9 45.9,10.3 44.6,10.3 44.6,11.2 44.6,15.9 44.5,16
  region net NetC10_1: 20.8,19.7 20.8,23.5 53.4,23.5 53.7,23.2 53.3,22.8 53.3,8 47.4,8 46.7,8 46.7,8.7 46.7,11.1 45.9,11.1 45.4,11.1 45.4,13.7 47.3,13.7 48,13 48,10 51.3,10 51.4,10.1 51.2,10.3 51.2,18.3 51.1,18.4 51,18.3 48.3,18.3 47.6,18.3 47.6,19 35,19 35,15.7 31.9,15.7 31.1,16.5 31.1,21.8 31.3,22 31.1,22.2 22.7,22.2 22.5,22 22.5,19.7
  region net GND_D: 50.2,15.7 50.2,17.8 36.9,17.8 36.5,17.4 36.5,13.4 35.2,13.4 34.2,12.4 34.2,4.6 40.4,4.6 40.5,4.7 40,5.2 40,10.3 41.8,10.3 41.8,10.5 41.8,10.7 41.8,16.4 42,16.6 45.2,16.6 45.2,15.7
  region: 50.2,35.5 50.2,37.6 36.9,37.6 36.5,37.2 36.5,33.2 35.2,33.2 34.2,32.2 34.2,24.4 40.4,24.4 40.5,24.5 40,25 40,30.1 41.8,30.1 41.8,30.3 41.8,30.5 41.8,36.2 42,36.4 45.2,36.4 45.2,35.5
  region: 20.8,39.5 20.8,43.3 53.4,43.3 53.7,43 53.3,42.6 53.3,27.8 47.4,27.8 46.7,27.8 46.7,28.5 46.7,30.9 45.9,30.9 45.4,30.9 45.4,33.5 47.3,33.5 48,32.8 48,29.8 51.3,29.8 51.4,29.9 51.2,30.1 51.2,38.1 51.1,38.2 51,38.1 48.3,38.1 47.6,38.1 47.6,38.8 35,38.8 35,35.5 31.9,35.5 31.1,36.3 31.1,41.6 31.3,41.8 31.1,42 22.7,42 22.5,41.8 22.5,39.5
  region: 42.3,35.8 42.3,34.3 42.6,34.3 42.6,27.3 41.7,27.3 41.7,24.7 41.8,24.6 45.9,24.6 45.9,27.5 45.9,29.7 45.9,30.1 44.6,30.1 44.6,31 44.6,35.7 44.5,35.8
  region: 3.9,31.2 3.9,24.4 15,24.4 26.8,24.4 26.8,25.2 26.8,33.5 15.2,33.5 15.2,42 18.1,42 18.3,41.8 18.3,39.5 19.9,39.5 20,39.4 20,43.3 12.2,43.3 9.3,43.3 9.3,31.2
  region: 17.3,41.4 15.8,41.4 15.8,40 15.9,39.9 16.2,39.9 16.2,36.3 16.9,35.6 16.9,34.5 28.1,34.5 28.1,37.9 17.4,37.9 17.3,38
  region: 50.2,55.5 50.2,57.6 36.9,57.6 36.5,57.2 36.5,53.2 35.2,53.2 34.2,52.2 34.2,44.4 40.4,44.4 40.5,44.5 40,45 40,50.1 41.8,50.1 41.8,50.3 41.8,50.5 41.8,56.2 42,56.4 45.2,56.4 45.2,55.5
  region: 20.8,59.5 20.8,63.3 53.4,63.3 53.7,63 53.3,62.6 53.3,47.8 47.4,47.8 46.7,47.8 46.7,48.5 46.7,50.9 45.9,50.9 45.4,50.9 45.4,53.5 47.3,53.5 48,52.8 48,49.8 51.3,49.8 51.4,49.9 51.2,50.1 51.2,58.1 51.1,58.2 51,58.1 48.3,58.1 47.6,58.1 47.6,58.8 35,58.8 35,55.5 31.9,55.5 31.1,56.3 31.1,61.6 31.3,61.8 31.1,62 22.7,62 22.5,61.8 22.5,59.5
  region: 42.3,55.8 42.3,54.3 42.6,54.3 42.6,47.3 41.7,47.3 41.7,44.7 41.8,44.6 45.9,44.6 45.9,47.5 45.9,49.7 45.9,50.1 44.6,50.1 44.6,51 44.6,55.7 44.5,55.8
  region: 3.9,51.2 3.9,44.4 15,44.4 26.8,44.4 26.8,45.2 26.8,53.5 15.2,53.5 15.2,62 18.1,62 18.3,61.8 18.3,59.5 19.9,59.5 20,59.4 20,63.3 12.2,63.3 9.3,63.3 9.3,51.2
  region: 17.3,61.4 15.8,61.4 15.8,60 15.9,59.9 16.2,59.9 16.2,56.3 16.9,55.6 16.9,54.5 28.1,54.5 28.1,57.9 17.4,57.9 17.3,58

## Silkscreen, mask and mechanical layers (free items; w line width, h text height)
Top Overlay:
  text "5V_D" at 50.6,58.3 h0.7
  text "GND_D" at 50.57,56.8 h0.7
  text "I_P" at 50.9,54.1 h0.7
  text "I_N" at 50.9,51.6 h0.7
  text "5V_D" at 50.6,48.4 h0.7
  text "GND_D" at 50.57,46.7 h0.7
  text "5V_D" at 50.6,38.3 h0.7
  text "GND_D" at 50.57,35.9 h0.7
  text "I_P" at 50.9,33.2 h0.7
  text "I_N" at 50.9,30.7 h0.7
  text "5V_D" at 50.6,28.4 h0.7
  text "GND_D" at 50.57,25.8 h0.7
  text "5V_D" at 50.6,18.5 h0.7
  text "GND_D" at 50.57,16.1 h0.7
  text "I_P" at 50.9,13.4 h0.7
  text "I_N" at 50.9,10.9 h0.7
  text "5V_D" at 50.6,8.6 h0.7
  text "GND_D" at 50.57,6 h0.7